# Altium PCB MainPCB.PcbDoc
Units mil, origin at the board's own origin, x right, y up, seen from the top; angles counter-clockwise.
Board outline 2350 x 2530 mil, 2 copper layers (Top Layer, Bottom Layer); 38 components, 28 nets, 114 pads, 3 vias.
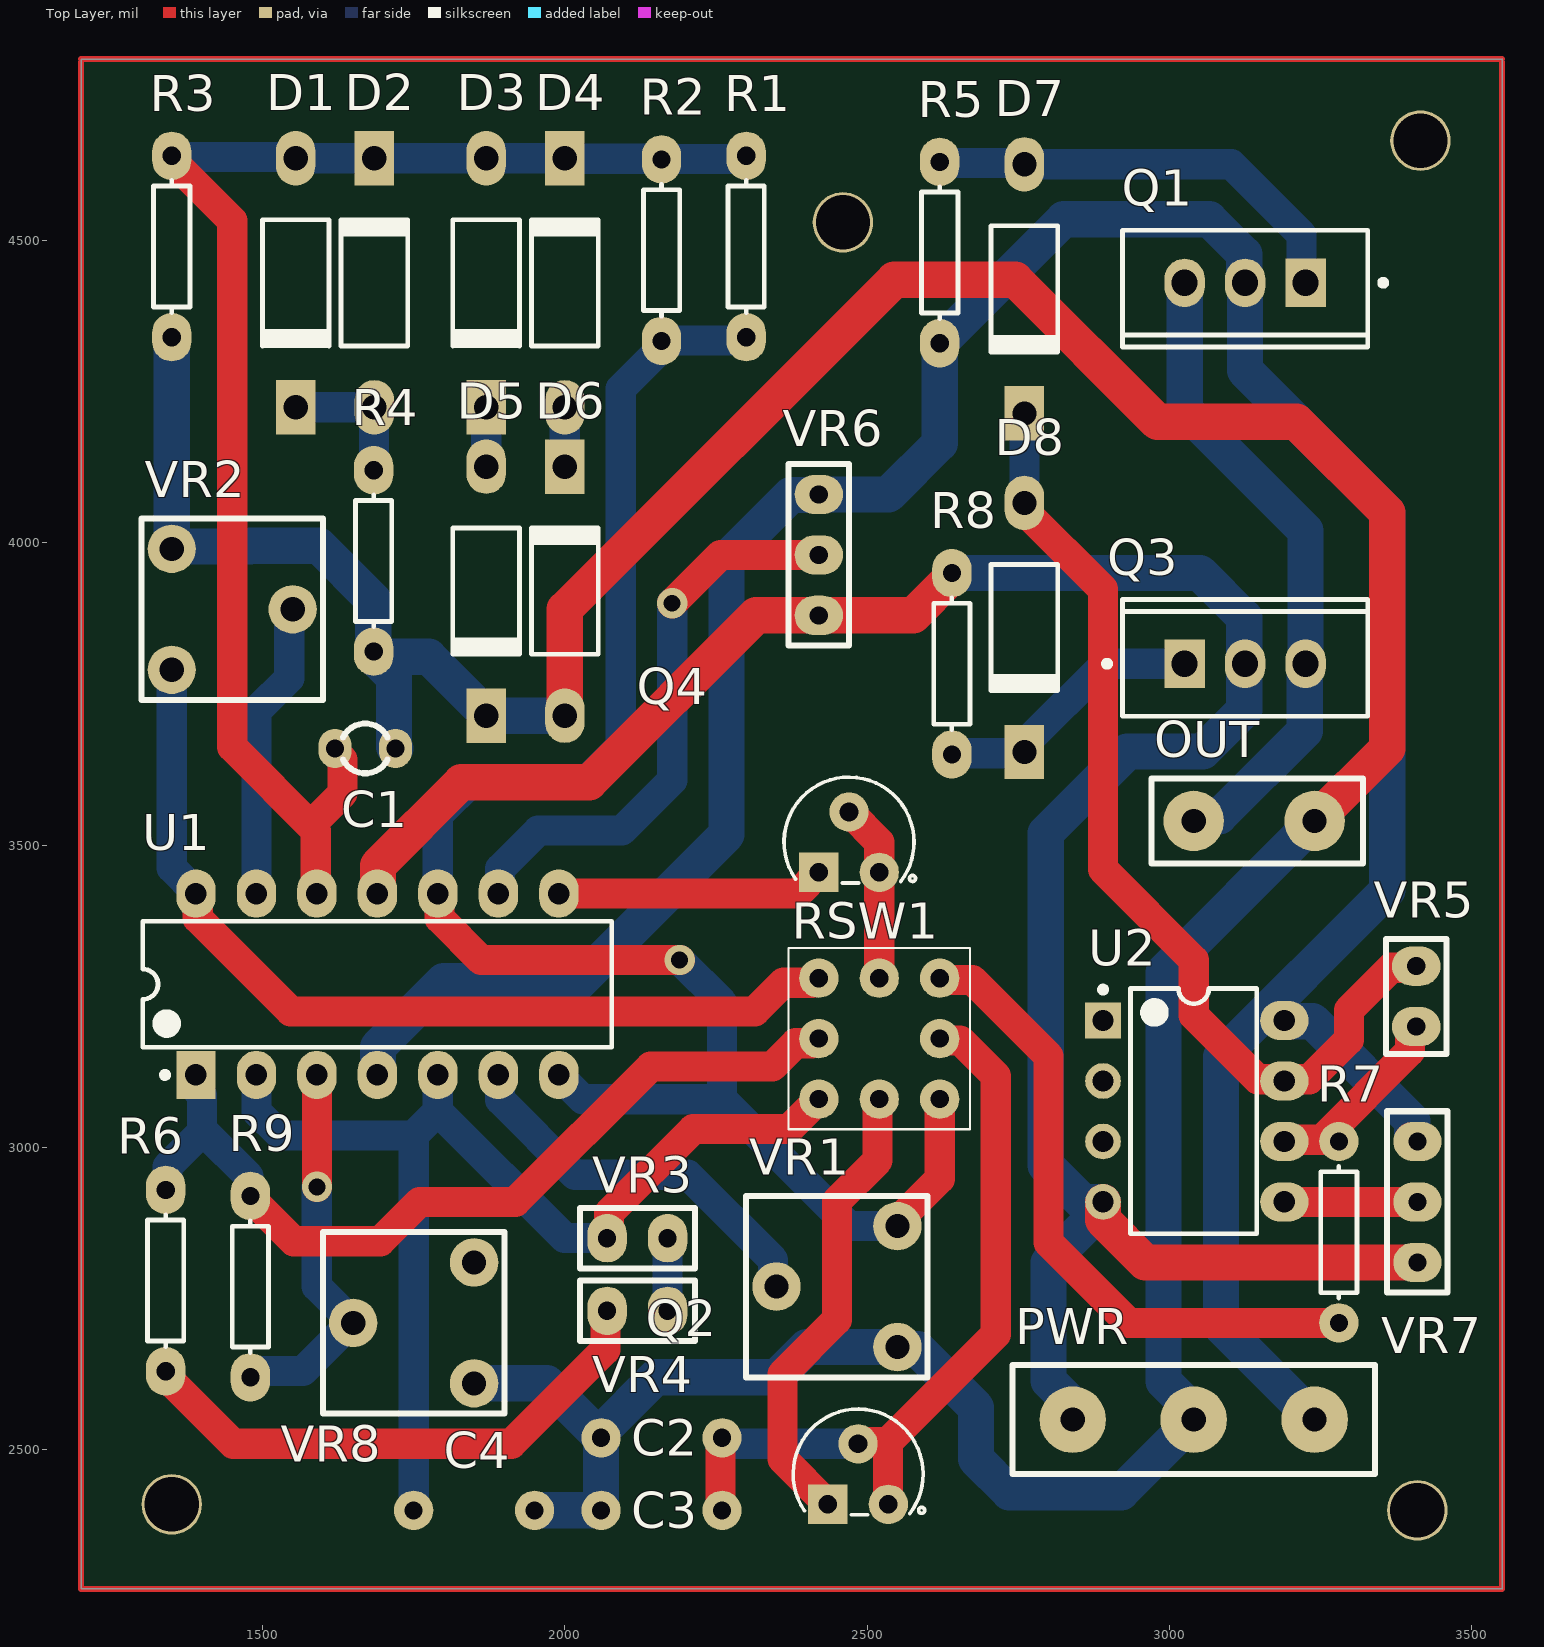
[diagram p0: Top Layer view]
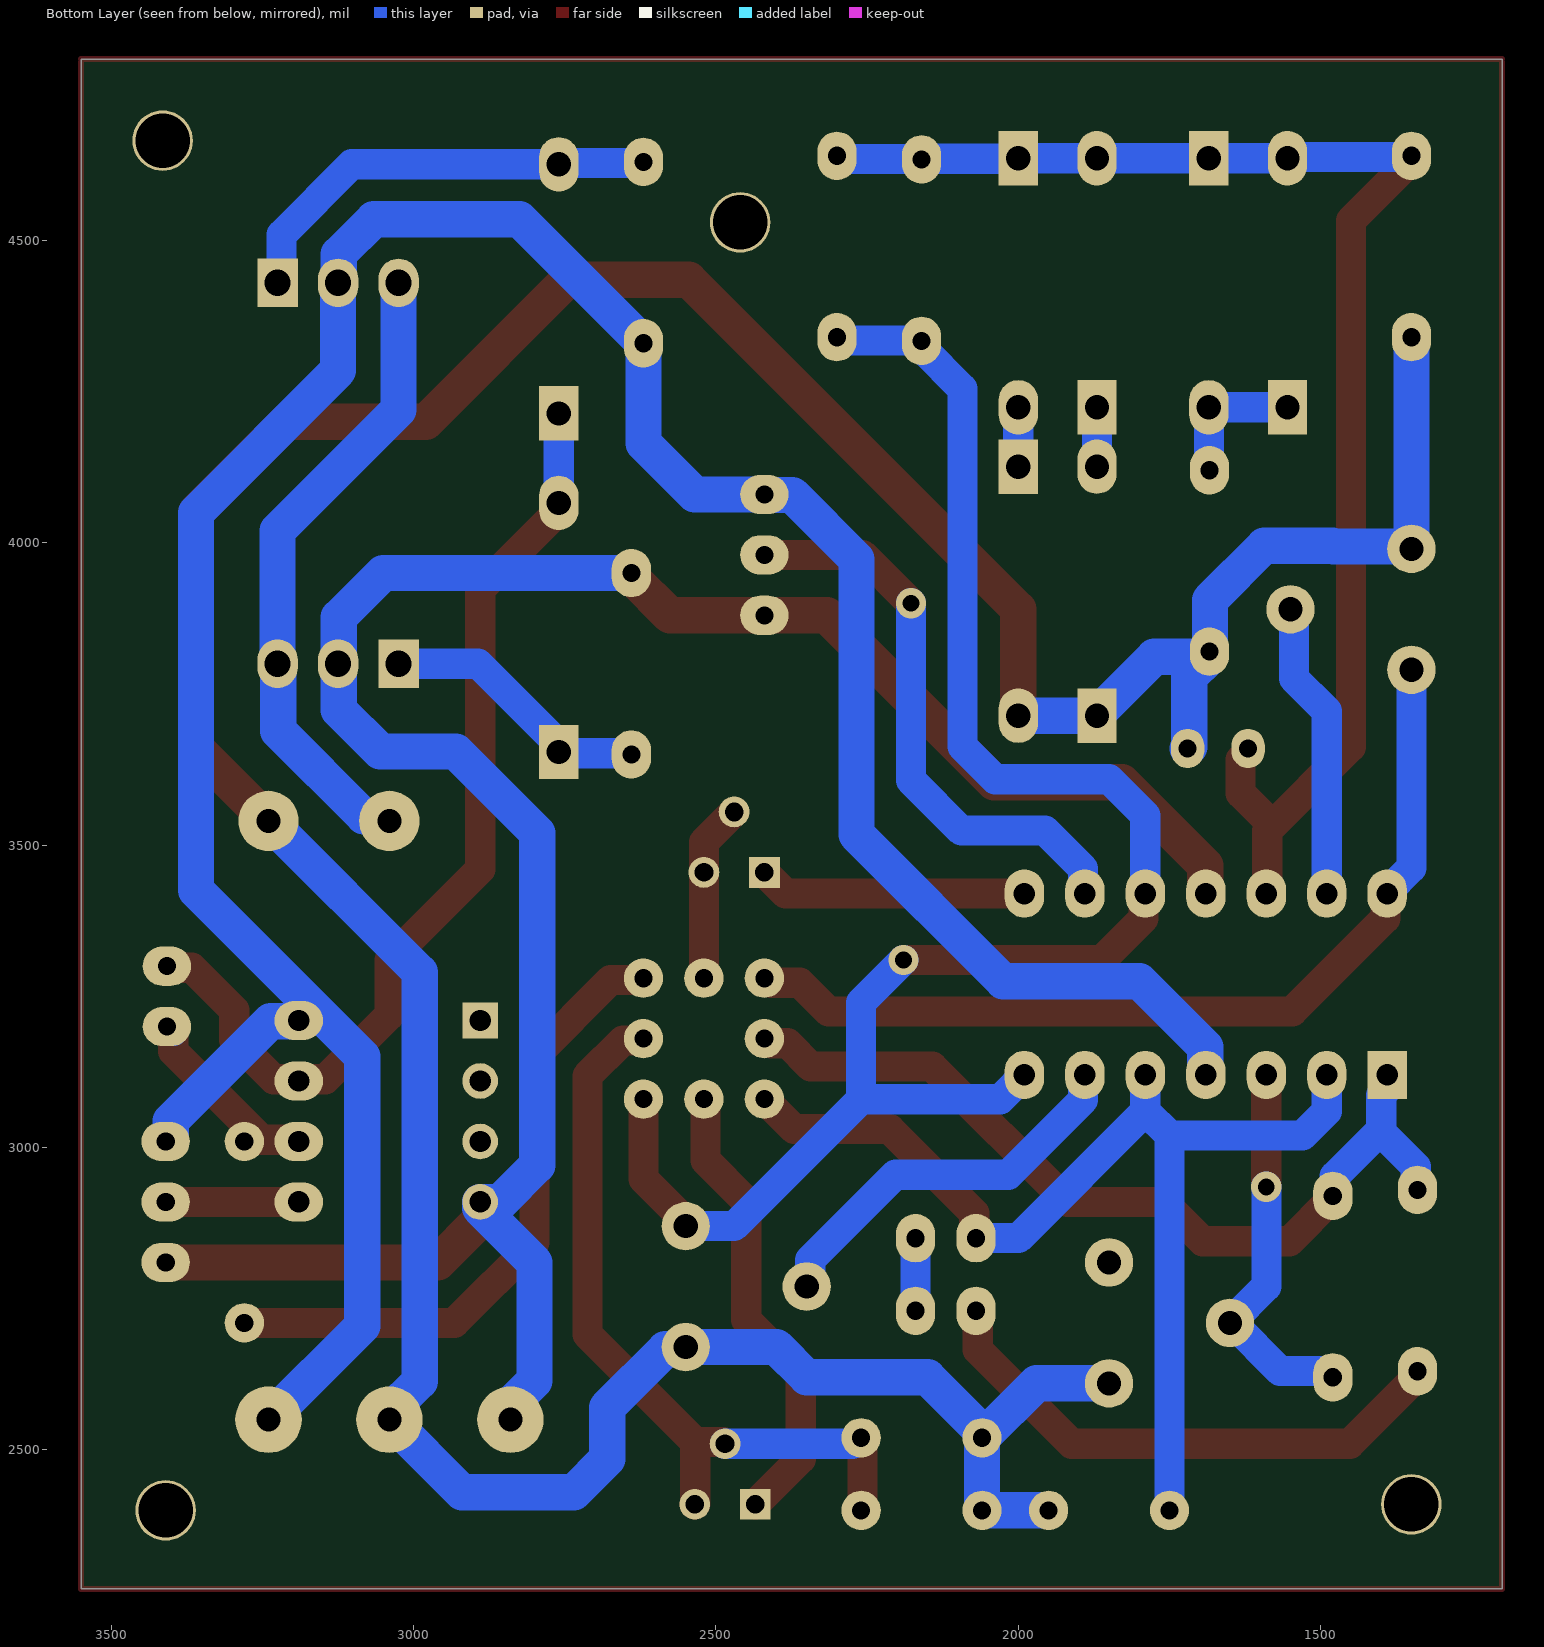
[diagram p1: Bottom Layer view, seen from below]
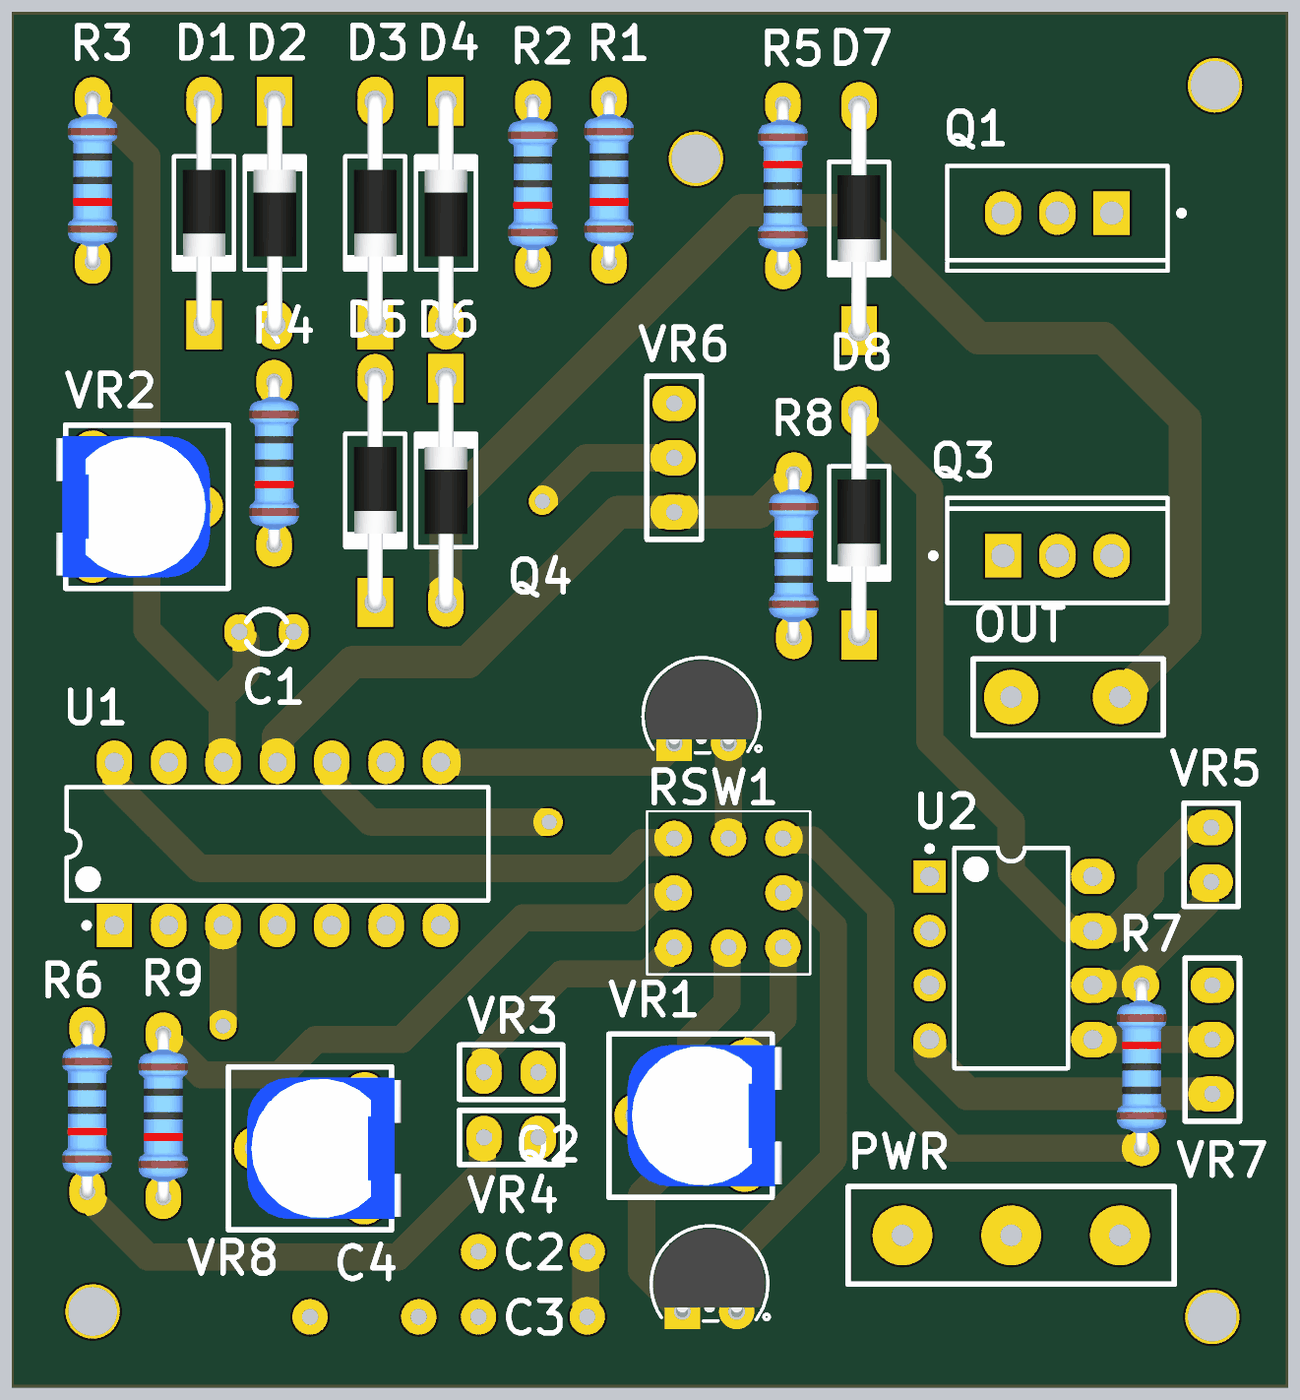
[diagram p2: 3D render of the assembled board from above, using the file's embedded part models]

## Layer stack, top to bottom
Top Solder: solder mask 0.4, Solder Resist, Dk 3.5
Top Layer: signal copper 1.4
Dielectric 1: dielectric 12.6, FR-4, Dk 4.8
Bottom Layer: signal copper 1.4
Bottom Solder: solder mask 0.4, Solder Resist, Dk 3.5

## Board outline
1200,2270 3550,2270 3550,4800 1200,4800

## Design rules (kind name [scope] priority, off if disabled: settings)
Clearance [All] p1: gap=35 ignorepadtopadclearanceinfootprint=FALSE except(0: Arc-Hole Track-Hole SMDPad-Hole THPad-Hole Via-Hole Fill-Hole Poly-Hole Region-Hole Text-Hole; 10: Arc-SMDPad Arc-Text Track-SMDPad Track-Text SMDPad-SMDPad SMDPad-THPad SMDPad-Via SMDPad-Text THPad-Text Via-Text Fill-Text Poly-Text Region-Text Text-Text; 33: THPad-THPad)
PolygonConnect [All] p1: connectstyle=Relief reliefconductorwidth=10 reliefentries=4 polygonreliefangle="90 Angle" airgapwidth=10
RoutingVias [All] p1: holewidth=28 width=50 viastyle="Through Hole" minholewidth=28 minwidth=50 maxholewidth=28 maxwidth=50
SolderMaskExpansion [All] p1: expansion=4 istentingtop=FALSE
Width Width_PWR [InNet('VEE') or InNet('VCC') or InNet('GND')] p1: maxlimit=70 minlimit=50 preferedwidth=60 minimp=50.000000 maximp=50.000000 favimp=50.000000
Width [All] p2: maxlimit=60 minlimit=40 preferedwidth=50 minimp=50.000000 maximp=50.000000 favimp=50.000000
30 further rules are at their usual default settings.

## Components (designator, comment, footprint, x,y, rotation, side; value= is the part's Value field where it differs from the comment)
C1 "Cap3" CAP3 1670,3660 r180 top
C2 "Cap3" CAP4(200mil) 2160,2520 r180 top
C3 "Cap3" CAP4(200mil) 2160,2400 r180 top
C4 "Cap3" CAP4(200mil) 1850,2400 r180 top
D1 "1N4007" 1N4007 1555,4430 r270 top
D2 "1N4007" 1N4007 1685,4430 r90 top
D3 "1N4007" 1N4007 1870,4430 r270 top
D4 "1N4007" 1N4007 2000,4430 r90 top
D5 "1N4007" 1N4007 1870,3920 r270 top
D6 "1N4007" 1N4007 2000,3920 r90 top
D7 "1N4007" 1N4007 2760,4420 r270 top
D8 "1N4007" 1N4007 2760,3860 r270 top
OUT "SigOut" PWR2 3140,3540 r0 top
PWR "PWR3" PWR3 3040,2550 r180 top
Q1 "TIP31" ONSC-TO-220-3-221A-09 3125,4430 r270 top
Q2 "B562" TO-92_ONS 2435,2410 r0 top
Q3 "TIP32" ONSC-TO-220-3-221A-09 3125,3800 r90 top
Q4 "D400" TO-92_ONS 2420,3455 r0 top
R1 "Res1" RES#1 2300,4490 r90 top
R2 "Res1" RES#1 2160,4484 r90 top
R3 "Res1" RES#1 1350,4490 r90 top
R4 "Res1" RES#1 1684,3970 r90 top
R5 "Res1" RES#1 2620,4480 r270 top
R6 "Res1" RES#1 1340,2780 r90 top
R7 "Res1" RES#2 3280,2860 r270 top
R8 "Res1" RES#1 2640,3800 r270 top
R9 "Res1" RES#1 1480,2770 r90 top
RSW1 "RotarySwitch" ROTARY_SWITCH 2520,3180 r0 top
U1 "TL084CN" N0014A 1690,3270 r90 top
U2 "LF412CN" N08E 3040,3060 r0 top
VR1 "VR3" VR_PRESET 2350,2770 r90 top
VR2 "VR3" VR_PRESET 1550,3890 r270 top
VR3 "VR2_2PIN" VR_VOL_CTRL_2 2120,2850 r0 top
VR4 "VR2_2PIN" VR_VOL_CTRL_2 2120,2730 r180 top
VR5 "VR2_2PIN" VR_VOL_CTRL_2 3408,3250 r90 top
VR6 "VR3" VR_VOL_CTRL 2420,3980 r90 top
VR7 "VR7" VR_VOL_CTRL 3410,2910 r270 top value=100k
VR8 "VR2" VR_PRESET 1650,2710 r90 top

## Footprints (in the part's own frame and the unit in brackets; to place one, negate y for a bottom-side part, rotate by r counter-clockwise, add the part's x,y. Pads: shape width x height; smd on the part's side, far side on the other; paste and mask are expansions set on the pad)
1N4007 [mil] "Diode, Axial; Body 5.2 x 2.7 mm (LxDia. max), Lead Dia. 0.86 mm (max)"
  oval 90x65 hole 40: 1(-205.91,0)
  rect 90x65 hole 40: 2(205.91,0)
  silkscreen extent -104,-55 108,55, body extent -220,-39 220,39, height 79
CAP3 [mil] "THD, 2-Leads"
  oval 55x65 hole 30: 1(-50,0) 2(50,0)
  silkscreen extent -37,-41 37,41, body extent -92,-49 92,49, height 243
CAP4(200mil) [mil] "THD, 2-Leads"
  round 65 hole 30: 1(-100,0) 2(100,0)
  body extent -92,-49 92,49, height 243
N08E [mm] "DIP, 8-Pin, Row Spacing 7.62 mm, Pitch 2.54 mm"
  rect 1.5x1.5 hole 0.9: 1(-3.81,3.81)
  round 1.5 hole 0.9: 2(-3.81,1.27) 3(-3.81,-1.27) 4(-3.81,-3.81)
  oval 2.032x1.651 hole 0.9: 5(3.81,-3.81) 6(3.81,-1.27) 7(3.81,1.27) 8(3.81,3.81)
  silkscreen extent -3.93,-5.15 2.65,5.23, body extent -3.6,-5.15 3.6,5.15, height 5.33
N0014A [mil] "DIP, 14-Leads, Body 19.7x6.6mm, Pitch 2.54mm"
  rect 80x65 hole 35.43: 1(-150,300)
  oval 80x65 hole 35.43: 2(-150,200) 3(-150,100) 4(-150,0) 5(-150,-100) 6(-150,-200) 7(-150,-300) 8(150,-300) 9(150,-200) 10(150,-100) 11(150,0) 12(150,100) 13(150,200) 14(150,300)
  silkscreen extent -155,-388 104,388, body extent -155,-388 155,388, height 200
ONSC-TO-220-3-221A-09 [mm] "FM, 3-Leads, Body 10.3x4.85mm, Pitch 2.54mm"
  rect 2.032x1.7 hole 1.1: 1(0,2.54)
  oval 2.032x1.7 hole 1.1: 2(0,0) 3(0,-2.54)
  silkscreen extent -2.2,-5.15 2.7,5.93, body extent -2.18,-5.15 2.67,5.15, height 19.85
PWR2 [mil]
  round 100 hole 40: 1(-100,0) 2(100,0)
  silkscreen extent -170,-70 180,70
PWR3 [mil]
  round 110 hole 40: 1(-200,0) 2(0,0) 3(200,0)
  silkscreen extent -300,-90 300,90
RES#1 [mil] "Axial Device, Thru-Hole; 2 Leads; 0.3 in Pin Spacing"
  oval 80x65 hole 30: 1(-150,0) 2(150,0)
  silkscreen extent -109,-30 109,30, body extent -161,-46 161,46, height 96
RES#2 [mil] "Axial Device, Thru-Hole; 2 Leads; 0.3 in Pin Spacing"
  round 65 hole 30: 1(-150,0) 2(150,0)
  silkscreen extent -109,-30 109,30, body extent -161,-46 161,46, height 96
ROTARY_SWITCH [mil]
  round 65 hole 30: A(100,100) A1(100,-100) A3(0,100) A4(-100,100) B(0,-100) B2(-100,0) C(100,0) C2(-100,-100)
  silkscreen extent -150,-150 150,150
TO-92_ONS [mil]
  rect 65x65 / inner rect 51x51 / far side rect 51x51 hole 31 mask+0: 1(0,0)
  round 65 / inner round 51 / far side round 51 hole 31 mask+0: 2(50,100) 3(100,0)
  silkscreen extent -57,-18 160,157, body extent -52,-11 152,153, height 300
VR_PRESET [mil] "200x200mil"
  round 80 hole 40: 1(0,0) 2(-100,-200) 3(100,-200)
  silkscreen extent -150,-250 150,50, body extent -130,-268 130,16, height 277
VR_VOL_CTRL [mil] "200x50mil"
  oval 65x80 hole 30: 1(0,0) 2(-100,0) 3(100,0)
  silkscreen extent -150,-50 150,50
VR_VOL_CTRL_2 [mil] "200x50mil"
  oval 65x80 hole 30: 1(-50,0) 2(50,0)
  silkscreen extent -95,-50 95,50

## Part data
C1 C2 C3 C4: "Capacitor", PackageDescription="Capacitor; 2 Leads", PackageReference=CAPR5-4X5, Published=23-Sep-2002, Publisher="Altium Limited"
D1 D2 D3 D4 D5 D6 D7 D8: "1 Amp General Purpose Rectifier", Code_JEDEC=DO-204-AL, ComponentLink1Description="Manufacturer Link", ComponentLink1URL=http://www.fairchildsemi.com/, ComponentLink2Description=Datasheet, ComponentLink2URL=http://www.fairchildsemi.com/ds/1N%2F1N4001.pdf, DatasheetVersion=1998, LatestRevisionDate=17-Jul-2002, LatestRevisionNote="Re-released for DXP Platform.", PackageDescription="Diode, Axial; Body 5.2 x 2.7 mm (LxDia. max), Lead Dia. 0.86 mm (max)", PackageReference=DO-41, PackageVersion=Aug-1999, Published=8-Jun-2000, Publisher="Altium Limited"
Q1: library part CMP-1048-01139-1, "Complementary Silicon Plastic Power Transistor, 3-Pin TO-220, Tube", Manufacturer="On Semiconductor", ComponentLink1Description="Manufacturer URL", ComponentLink1URL=http://www.onsemi.com/, ComponentLink2Description=Datasheet, ComponentLink2URL=http://www.onsemi.com/pub_link/Collateral/TIP31A-D.PDF, ComponentLink3Description="Package Specification", ComponentLink3URL=http://www.onsemi.com/pub_link/Collateral/221A-09.PDF, DatasheetVersion="Rev. 14", fT Min (MHz)=3, IC Continuous (A)=3, Mounting Technology="Through Hole", PackageDescription="3-Pin Flange Mount, Vertical Straight Lead, Body 9.97 x 4.445 mm, Pitch 2.54 mm", PackageReference=TO-220-3-221A-09, PackageVersion="Rev. AG, 09/2011", Packing=Tube, PartNumber=TIP31, Polarity=NPN, RoHS=FALSE
Q2: library part A733, "PNP General Purpose Transistor", ComponentLink1Description="Manufacturer Link", ComponentLink1URL=http://www.fairchildsemi.com/, ComponentLink2Description=Datasheet, ComponentLink2URL=http://www.fairchildsemi.com/ds/2N%2F2N3906.pdf, DatasheetVersion=1997, LatestRevisionDate=15-Jan-2003, LatestRevisionNote="PCB Footprint 'BCY-W3/D4.7' replaced", PackageDescription="TO, Flat Index; 3 In-Line, Axial Leads; Body Dia. 4.5mm; Leads 0.51 x 0.48 mm (max)", PackageReference=TO-92A, PackageVersion=Sep-1998, Published=8-Jun-2000, Publisher="Altium Limited"
Q3: library part CMP-1048-01071-1, "Complementary Silicon Plastic Power Transistor, 3-Pin TO-220, Tube", Manufacturer="On Semiconductor", ComponentLink1Description="Manufacturer URL", ComponentLink1URL=http://www.onsemi.com/, ComponentLink2Description=Datasheet, ComponentLink2URL=http://www.onsemi.com/pub_link/Collateral/TIP31A-D.PDF, ComponentLink3Description="Package Specification", ComponentLink3URL=http://www.onsemi.com/pub_link/Collateral/221A-09.PDF, DatasheetVersion="Rev. 14", fT Min (MHz)=3, IC Continuous (A)=3, Mounting Technology="Through Hole", PackageDescription="3-Pin Flange Mount, Vertical Straight Lead, Body 9.97 x 4.445 mm, Pitch 2.54 mm", PackageReference=TO-220-3-221A-09, PackageVersion="Rev. AG, 09/2011", Packing=Tube, PartNumber=TIP32, Polarity=PNP, RoHS=FALSE
Q4: library part C828, "NPN General Purpose Transistor", ComponentLink1Description="Manufacturer Link", ComponentLink1URL=http://www.fairchildsemi.com/, ComponentLink2Description=Datasheet, ComponentLink2URL=http://www.fairchildsemi.com/ds/2N%2F2N3904.pdf, DatasheetVersion=1997, LatestRevisionDate=15-Jan-2003, LatestRevisionNote="PCB Footprint 'BCY-W3/D4.7' replaced", PackageDescription="TO, Flat Index; 3 In-Line, Axial Leads; Body Dia. 4.5mm; Leads 0.51 x 0.48 mm (max)", PackageReference=TO-92A, PackageVersion=Sep-1998, Published=8-Jun-2000, Publisher="Altium Limited"
R1 R2 R3 R4 R5 R6 R7 R8 R9: "Resistor", LatestRevisionDate=17-Jul-2002, LatestRevisionNote="Re-released for DXP Platform.", PackageDescription="Axial Device, Thru-Hole; 2 Leads; 0.3 in Pin Spacing", PackageReference=AXIAL-0.3, Published=8-Jun-2000, Publisher="Altium Limited"
U1: library part CMP-0017-00818-2, "JFET-Input Operational Amplifier, 7 to 36 V, 0 to 70 degC, 14-pin DIP (N14), Pb-Free (RoHS)", Manufacturer="Texas Instruments", Rating=Catalog, Total Supply Voltage(Max)(+5V is 5, +/-5V is 10)=36, Total Supply Voltage(Min)(+5V is 5, +/-5V is 10)=7, CMRR(Min)(dB)=70, Code_JEDEC=MS-001, ComponentLink1Description="Manufacturer URL", ComponentLink1URL=http://www.ti.com/, ComponentLink2Description=Datasheet, ComponentLink2URL=http://www.ti.com/lit/ds/symlink/tl084.pdf, ComponentLink3Description="Package Specification", ComponentLink3URL=http://www.ti.com/lit/ml/mpdi002c/mpdi002c.pdf, DatasheetVersion=SLOS081G, Eco-Plan="Pb-Free (RoHS)", GBW(Typ)(MHz)=3, IIB(Max)(pA)=400, Iq per channel(Max)(mA)=2.8, Mounting Technology="Through Hole", Number of Channels=4, Offset Drift(Typ)(uV/C)=18, PackageDescription="14-Pin Plastic In-Line, Body 19.305 x 6.35 mm, Pitch 2.54 mm", PackageReference=N0014A, PackageVersion="4040049/E, 12/2002", PartNumber=TL084CN, Slew Rate(Typ)(V/us)=13, Sub Family="General Purpose Amplifier, High Supply Voltage Amplifier (>=30V)", Vio (25C)(Max)(mV)=15, Vn at 1kHz(Typ)(nV/rtHz)=18
U2: library part CMP-0055-00193-2, "Low Offset, Low Drift Dual JFET Input Operational Amplifier, 8-pin MDIP", Manufacturer="National Semiconductor", PackageTopMarking=NSUZXYTTE#*LF*412CN, PowerWise=N, Code_JEDEC=MS-001-BA, ComponentLink1Description="LF412 Datasheet", ComponentLink1URL=http://www.national.com/ds/LF/LF412.pdf, ComponentLink2Description="LF412 Web Page", ComponentLink2URL=http://www.national.com/pf/LF/LF412.html, ComponentLink3Description="N08E Package Page", ComponentLink3URL=http://www.national.com/packaging/folders/n08e.html, CompType=Amplifiers, DatasheetVersion=Jan-2010, PackageDescription="MDIP, .365 x .250 x .130in, 8 Lead, .100in Pitch", PackageReference=N08E, PackageVersion="revG, May-2006", PinCount=8, RevisionNote="Component URLs added", RoHS=N
VR7: library part VR3

## Free pads (board coordinates)
  round 100 hole 90: 2(1350,2410) 2(2460,4530) 2(3410,2400) 2(3415,4665)

## Via types
v1: diameter 50, hole 28, Top Layer to Bottom Layer, 3 vias

## Nets (pads, with @x,y where several pads share a name; then routed paths per layer and width w, separated by ;. In a path a pad name is that pad's centre, name@x,y a point inside that pad or via, vN(x,y) a via of type N, cw(c..) or ccw(c..) an arc to the next point about the centre after c; other vN are vias at no path point)
GND: C1.1 C2.2 C3.2 C4.1 D5.2 D6.1 OUT.2 PWR.2 R3.1 R4.1 VR1.2 VR2.2 VR8.2 | length 6692.3
  Top Layer w60: D6.1 2000,3890 2545,4435 2745,4435 2980,4200 3210,4200 3360,4050 3360,3660 OUT.2 ; VR1.2 VR1.2@2553.83,2666.17 ; PWR.2 PWR.2@3040,2574.35
  Bottom Layer w60: R3.1 VR2.2 1353.83,3993.83 1479.24,3993.83 1480.41,3995 1593.49,3995 1683.04,3905.45 1683.04,3820.96 R4.1 R4.1@1684,3813.85 ; C1.1 1717.5,3662.5 1717.5,3777.65 1684,3811.15 R4.1@1684,3813.85 ; VR8.2 1970,2610 C2.2 ; D5.2 1870,3716.59 1775.05,3811.54 1686.31,3811.54 R4.1@1684,3813.85 ; D5.2@1872.5,3710.09 1872.5,3714.09 D6.1 ; C4.1 C3.2 C2.2 ; OUT.2 2990,3290 2990,2613.53 3040,2563.53 PWR.2 2920,2430 2735,2430 2680,2485 2680,2570 2583.83,2666.17 2553.83,2666.17 VR1.2 2400,2670 2350,2620 2150,2620 2060.96,2530.96 2060.96,2520.96 C2.2
NetC1_2: C1.2 D1.1 D2.2 D3.1 D4.2 R1.2 R2.2 R3.2 U1.12 | length 2428.6
  Top Layer w50: R3.2 1350,4632.5 1450,4532.5 1450,3662.45 1588.27,3524.18 1588.27,3421.73 U1.12 ; 1579.61,3532.84 1632.5,3585.72 1632.5,3641.15 1620,3653.65 C1.2
  Bottom Layer w50: R3.2 1352.05,4637.95 1552.95,4637.95 D1.1 D2.2 D3.1 D4.2 2000.95,4634.95 2159.05,4634.95 R2.2 2166.43,4634 2166.93,4634.5 2294.5,4634.5 R1.2
NetC2_1: C2.1 C3.1 Q2.2 Q2.3 RSW1.C | length 1301.9
  Top Layer w50: C3.1 2257.5,2402.5 2257.5,2517.5 C2.1 ; Q2.2 2487.87,2512.87 2534.29,2512.87 ; Q2.3 2534.29,2410.71 2534.29,2512.87 ; RSW1.C 2622.87,3177.13 2653.68,3177.13 2712.5,3118.31 2712.5,2691.08 2534.29,2512.87
  Bottom Layer w50: C2.1 2264.06,2520 2274.06,2510 Q2.2@2484.73,2510
NetC4_2: C4.2 RSW1.C2 U1.2 U1.5 VR3.1 | length 1903.8
  Top Layer w50: VR3.1@2072.87,2852.87 2072.87,2891.18 2212.27,3030.58 2370.58,3030.58 RSW1.C2
  Bottom Layer w50: U1.2 1490,3060 1530,3020 1750,3020 ; C4.2 1750,3020 ; U1.5 1790,3060 ; VR3.1 2069.63,2850.37 1999.63,2850.37 1790,3060 ; 1750,3020 1790,3060
NetD1_2: D1.2 D2.1 R4.2 | length 234.5
  Bottom Layer w50: D1.2 D2.1 1684.5,4223.59 1684.5,4120.5 R4.2
NetD3_2: D3.2 D5.1 | length 98.2
  Bottom Layer w50: D5.1 D3.2
NetD4_1: D4.1 D6.2 | length 98.2
  Bottom Layer w50: D6.2 D4.1
NetD7_1: D7.1 Q1.1 R5.1 | length 733.9
  Bottom Layer w50: R5.1 2620,4627.95 D7.1@2760,4627.95 ; D7.1 D7.1@2760,4627.95 ; Q1.1 3218.46,4436.54 3218.46,4509.6 3102.16,4625.91 2766.93,4625.91 2764.88,4627.95 D7.1@2760,4627.95
NetD7_2: D7.2 D8.1 U2.7 VR5.2 | length 1639.6
  Top Layer w50: D8.1 2760,4053.41 2890,3923.41 2890,3460 3040,3310 3040,3218.87 3146,3112.87 3187.13,3112.87 U2.7 3192.87,3112.87 3231.18,3112.87 3296.68,3178.37 3296.68,3227 3366.82,3297.13 3405.13,3297.13 VR5.2
  Bottom Layer w50: D8.1 D7.2 ; U2.7 U2.7@3192.87,3112.87 ; VR5.2@3405.13,3297.13 VR5.2
NetD8_2: D8.2 Q3.1 R8.2 | length 462.2
  Bottom Layer w50: R8.2 2640,3652.05 2757.95,3652.05 D8.2 2760,3666.59 2893.41,3800 Q3.1 Q3.1@3025,3793.46
NetOUT_1: OUT.1 Q1.3 Q3.3 | length 1069.8
  Bottom Layer w60: Q1.3 3025,4220 3225,4020 Q3.3 3223.67,3798.67 3223.67,3688.94 3082.39,3547.65 3047.65,3547.65 OUT.1
NetQ2_1: Q2.1 RSW1.B | length 767.3
  Top Layer w50: Q2.1 2360,2485 2360,2625 2450,2715 2450,2911.42 2517.13,2978.55 2517.13,3077.13 RSW1.B
NetQ4_1: Q4.1 U1.8 | length 444.5
  Top Layer w50: U1.8 2385,3420 Q4.1
NetQ4_2: Q4.2 Q4.3 RSW1.A3 | length 295.7
  Top Layer w50: Q4.2 2520,3505 Q4.3 RSW1.A3
NetR1_1: R1.1 R2.1 RSW1.A1 U1.7 U1.10 VR1.3 | length 2951.6
  Top Layer w50: U1.10 1792.87,3417.13 1792.87,3378.82 1861.69,3310 v1(2190,3310) ; VR1.3 2550,2878.12 2620,2948.12 RSW1.A1
  Bottom Layer w50: U1.10 1790,3549.09 1850,3609.09 2038.31,3609.09 2092.5,3663.28 2092.5,4254.94 2160,4322.44 R2.1 2166.43,4334 2166.93,4334.5 2294.5,4334.5 R1.1 ; U1.7 1990,3116.56 2001.56,3105 2005,3105 2030,3080 2260,3080 ; v1(2190,3310) 2260,3240 2260,3080 ; VR1.3 2470,2870 2260,3080
NetR6_1: R6.1 VR4.2 | length 911.8
  Top Layer w50: R6.1 1340,2621.69 1451.69,2510 1911.69,2510 2067.13,2665.44 2067.13,2727.13 VR4.2
NetR6_2: R6.2 R9.2 RSW1.B2 U1.1 | length 1466.7
  Top Layer w50: R9.2 1480,2916.56 1551.56,2845 1695,2845 1760,2910 1918.31,2910 2142.26,3133.95 2343.13,3133.95 2381.69,3172.5 2408.44,3172.5 2415.94,3180 RSW1.B2
  Bottom Layer w50: R6.2 1342.87,2932.87 1342.87,2968.08 1400,3025.21 1400,3086.3 1394.53,3091.77 1394.53,3115.47 U1.1 ; 1405,3024.79 1477.13,2952.66 1477.13,2922.87 R9.2
NetR7_1: R7.1 U2.6 VR5.1 | length 333.9
  Top Layer w50: U2.6 3192.87,3012.87 3251.39,3012.87 3397.63,3159.11 3397.63,3193.07 3404.56,3200 VR5.1
  Bottom Layer w50: R7.1 R7.1@3282.87,3012.87 ; VR5.1@3397.63,3193.07 3404.56,3200 VR5.1
NetR7_2: R7.2 RSW1.A | length 1076.7
  Top Layer w50: RSW1.A 2622.87,3277.13 2673.89,3277.13 2800,3151.02 2800,2842.72 2932.72,2710 R7.2
NetR9_1: R9.1 U1.3 VR8.1 | length 650.5
  Top Layer w50: v1(1590,2935) U1.3 ; VR8.1@1645.74,2714.26 VR8.1
  Bottom Layer w50: R9.1 1480,2623.44 1486.93,2630.37 1567,2630.37 1646.63,2710 VR8.1 1589.65,2770.35 1589.65,2934.65 v1(1590,2935)
NetRSW1_A4: RSW1.A4 U1.14 VR2.3 | length 1546.6
  Top Layer w50: U1.14 1392.87,3417.13 1392.87,3378.82 1546.69,3225 2313.98,3225 2361.48,3272.5 2401.89,3272.5 2408.44,3272.5 2415.94,3280 RSW1.A4
  Bottom Layer w50: VR2.3 1350,3462.45 1390,3422.45 U1.14 U1.14@1392.87,3417.13
NetU1_6: U1.6 VR1.1 | length 649.9
  Bottom Layer w50: U1.6 1892.87,3117.13 1892.87,3078.82 2016.7,2954.99 2203.33,2954.99 2344.26,2814.05 2344.26,2775.74 VR1.1
NetU1_9: U1.9 VR6.1 | length 955.7
  Top Layer w50: v1(2177.5,3900) 2257.5,3980 VR6.1
  Bottom Layer w50: U1.9 1892.87,3422.87 1892.87,3461.18 1955.78,3524.09 2094.09,3524.09 2177.5,3607.5 v1(2177.5,3900)
NetU1_13: U1.13 VR2.1 | length 494.9
  Bottom Layer w50: U1.13 1490,3721.88 1544.26,3776.14 1544.26,3884.26 VR2.1
NetU2_5: U2.5 VR7.1 | length 220
  Top Layer w50: U2.5 VR7.1
NetVR3_2: VR3.2 VR4.1 | length 120
  Bottom Layer w50: VR4.1 VR3.2
VCC: PWR.1 Q1.2 R5.2 U1.4 U2.8 VR6.3 VR7.2 | length 4986.9
  Top Layer w60: Q1.2 Q1.2@3126.33,4428.67 ; U2.8 U2.8@3190.96,3209.04 ; VR7.2@3401.54,3012.31 3403.85,3010 VR7.2
  Bottom Layer w60: U1.4 1690.96,3120.96 1690.96,3166.34 1799.61,3275 2025,3275 2267.5,3517.5 2267.5,3972.89 2373.66,4079.04 2419.04,4079.04 VR6.3 2535.26,4080 2620,4164.74 R5.2@2620,4336.15 ; U2.8 3190.96,3209.04 3236.34,3209.04 3401.54,3043.84 3401.54,3012.31 3403.85,3010 VR7.2 ; PWR.1 3085,2705 3085,3150.39 3360,3425.39 3360,4049.78 3125,4284.78 Q1.2 3123.67,4431.33 3123.67,4477.11 3065.79,4535 2825,4535 2628.46,4338.46 2622.31,4338.46 R5.2@2620,4336.15 ; R5.2@2620,4336.15 R5.2 R5.2@2620,4336.15
VEE: PWR.3 Q3.2 R8.1 U1.11 U2.4 VR6.2 VR7.3 | length 3948.4
  Top Layer w60: U1.11 1690.96,3420.96 1690.96,3466.34 1828.71,3604.09 2040.39,3604.09 2316.29,3880 VR6.2 2576.15,3880 2640,3943.85 R8.1 ; U2.4 2890,2880 2960,2810 VR7.3
  Bottom Layer w60: R8.1@2640,3943.85 R8.1 3050.39,3950 3123.67,3876.71 3123.67,3801.33 Q3.2 3123.67,3798.67 3123.67,3723.67 3055,3655 2930.33,3655 2795.47,3520.14 2795.47,2970.85 2856.32,2910 U2.4 2890,2900 2800,2810 2800,2614.35 2840,2574.35 PWR.3
pads on no net: U2.1 U2.2 U2.3 VR8.3
copper on no net: | length 9750
  Top Layer w10: 1200,4795 1200,2270 3550,2270 3550,4795 ; 1200,4800 3550,4800

## Text inside footprints (layer, text, board x,y; h text height)
Q2: Mechanical 7 "0.165in/4.191mm" at 2125,2447.5 h25; Mechanical 7 "0.205in/5.207mm" at 2391.25,2632.5 h25; Mechanical 7 "0.1in/2.54mm" at 2657.5,2447.5 h25; Mechanical 7 "0.1in/2.54mm" at 2410,2272.25 h25
Q4: Mechanical 7 "0.165in/4.191mm" at 2110,3492.5 h25; Mechanical 7 "0.205in/5.207mm" at 2376.25,3677.5 h25; Mechanical 7 "0.1in/2.54mm" at 2642.5,3492.5 h25; Mechanical 7 "0.1in/2.54mm" at 2395,3317.25 h25